# Altium PCB DE-130624.PcbDoc
Units mil, origin at the board's own origin, x right, y up, seen from the top; angles counter-clockwise.
Board outline 1584.68 x 1584.83 mil, 2 copper layers (Top Layer, Bottom Layer); 25 components, 19 nets, 66 pads, 2 vias.
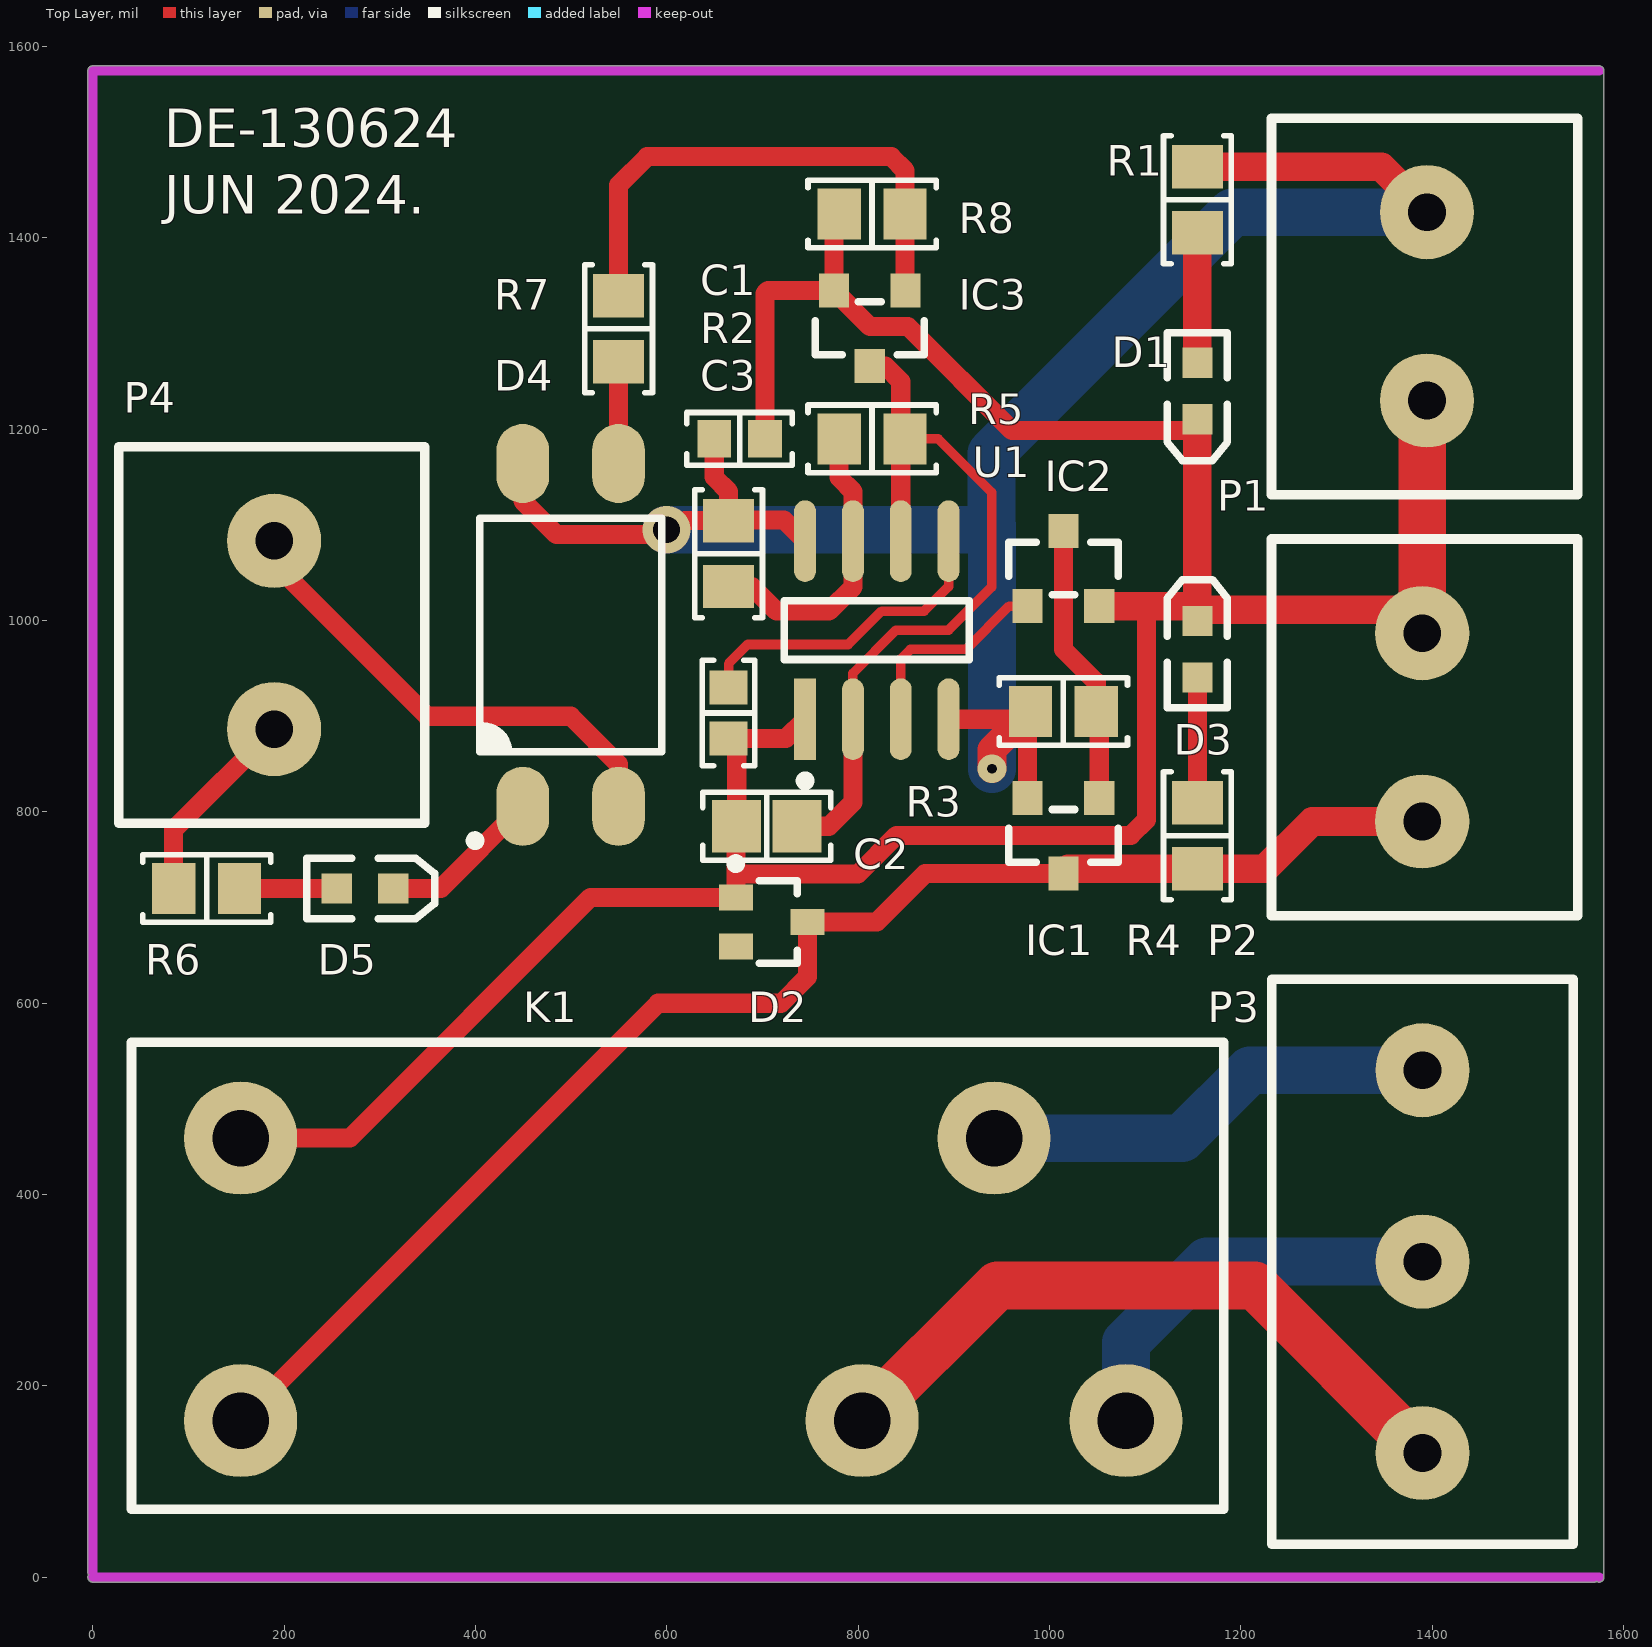
[diagram p0: Top Layer view]
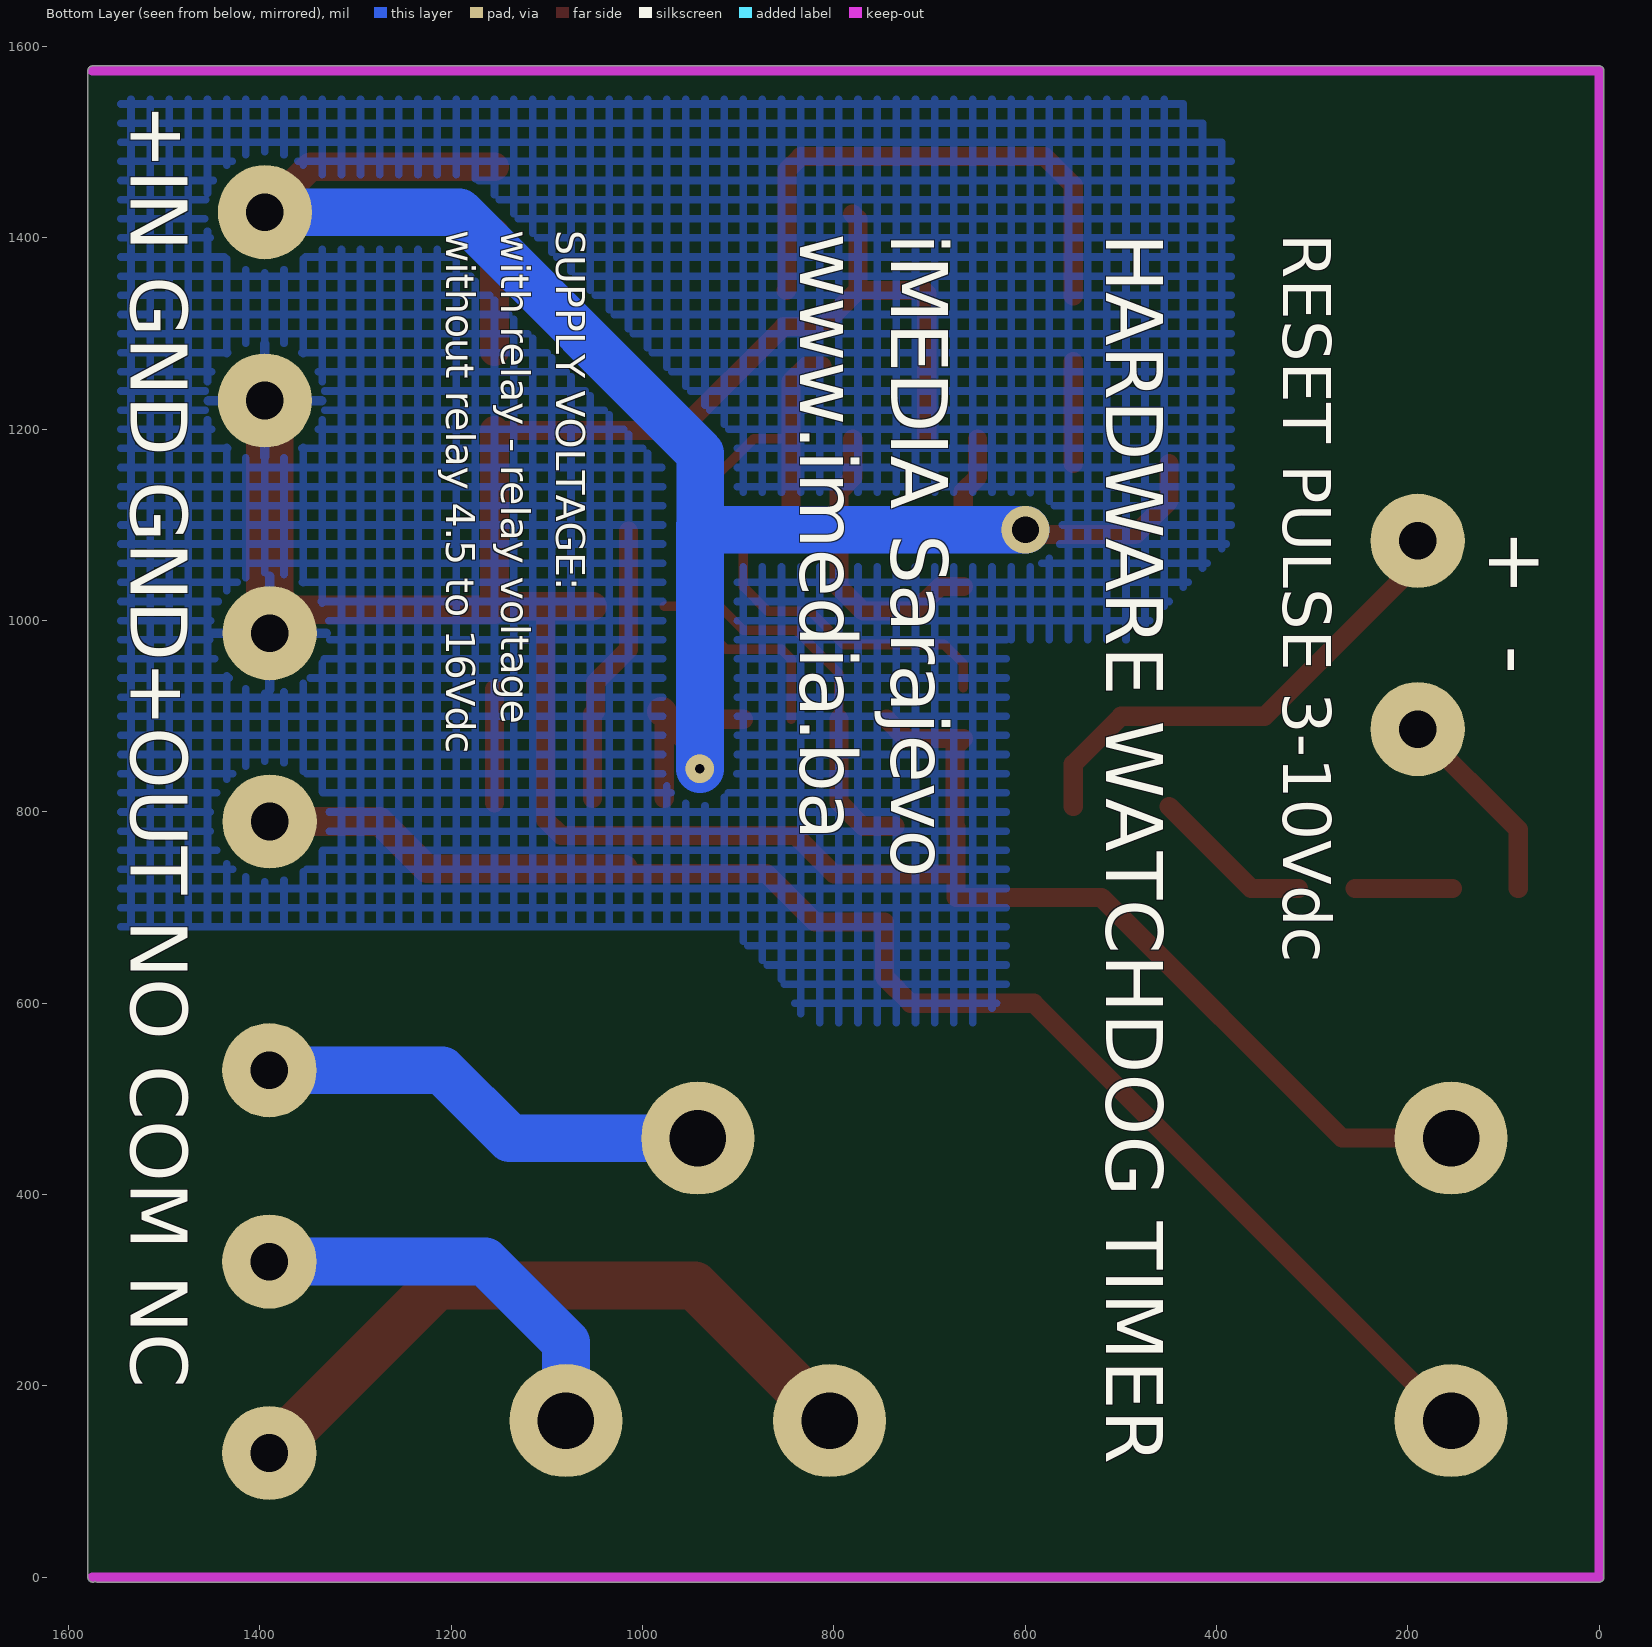
[diagram p1: Bottom Layer view, seen from below]
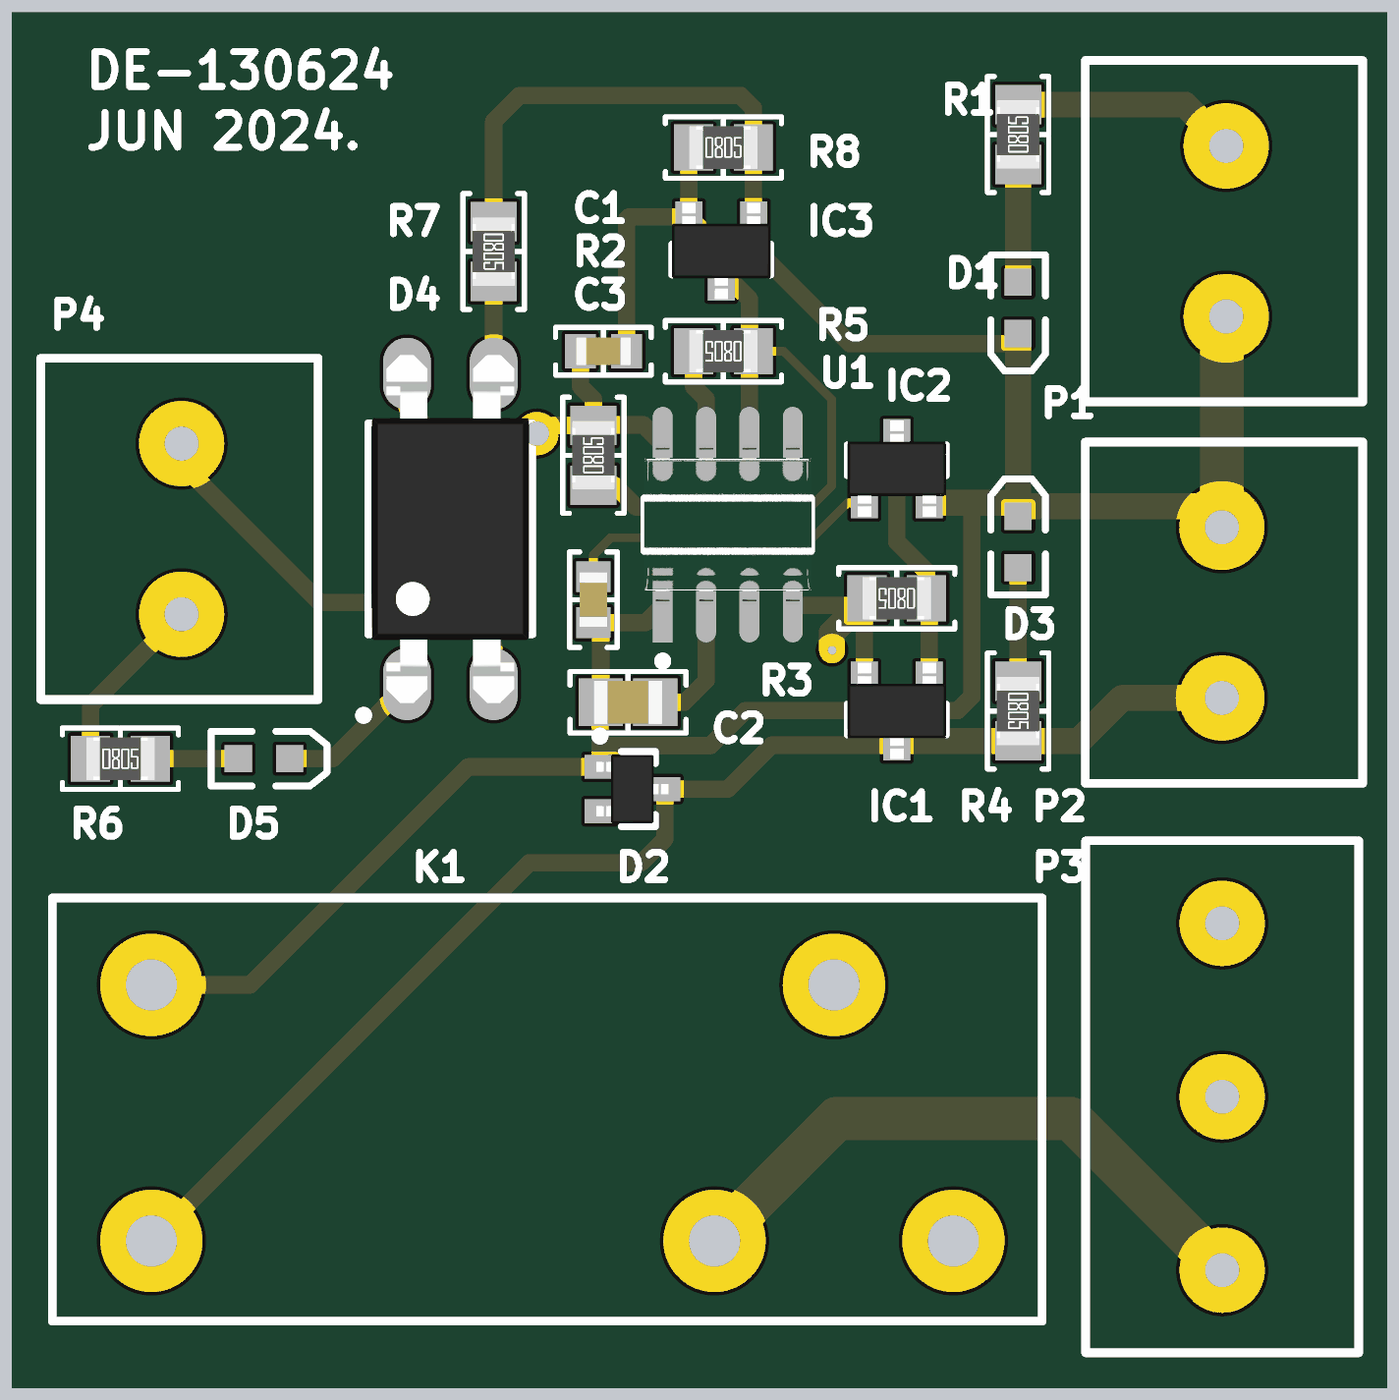
[diagram p2: 3D render of the assembled board from above, using the file's embedded part models]

## Layer stack, top to bottom
Top Solder: solder mask 0.4, Solder Resist, Dk 3.5
Top Layer: signal copper 1.4
Dielectric 1: dielectric 12.6, FR-4, Dk 4.8
Bottom Layer: signal copper 1.4
Bottom Solder: solder mask 0.4, Solder Resist, Dk 3.5

## Board outline
-4.35,2.5 ccw(c0,0) 0,-5.01 1569.65,-5.01 ccw(c1569.65,0) 1572.15,-4.35 ccw(c1574.65,0) 1579.66,0 1579.66,1574.8 ccw(c1574.65,1574.8) 1574.65,1579.82 0,1579.82 ccw(c0,1574.8) -5.02,1574.8 -5.02,5 ccw(c0,5)

## Design rules (kind name [scope] priority, off if disabled: settings)
Clearance [All] p1: gap=10 ignorepadtopadclearanceinfootprint=FALSE except(5: Arc-Text Track-Text SMDPad-Text THPad-Text Via-Text Fill-Text Poly-Text Region-Text Text-Text)
MinimumSolderMaskSliver [All] p1: minsoldermaskwidth=5
PolygonConnect [All] p1: connectstyle=Relief reliefconductorwidth=10 reliefentries=4 polygonreliefangle="90 Angle" airgapwidth=10
RoutingVias [All] p1: holewidth=28 width=50 viastyle="Through Hole" minholewidth=28 minwidth=50 maxholewidth=28 maxwidth=50
SilkToSolderMaskClearance [IsPad] p1: minsilkscreentomaskgap=5 clearancetoexposedcopper=TRUE
SolderMaskExpansion [All] p1: expansion=4
Width [All] p1: maxlimit=100 minlimit=10 preferedwidth=30
28 further rules are at their usual default settings.

## Classes and differential pairs
component class DE-130624: C1 C2 D1 D2 D3 D4 IC1 IC2 IC3 K1 P1 P2 P3 P4 R1 R2 R3 R4 R5 R6 R7 R8 U1

## Components (designator, comment, footprint, x,y, rotation, side; value= is the part's Value field where it differs from the comment)
C1 "0.1 µF" "CAP 0603_1608" 676.22,1190 r180 top
C2 "10 µF" "CAP 0805_2012" 704.65,785 r0 top
C3 "10 nF" "CAP 0603_1608" 664.65,903.43 r90 top
D1 "Green" 1.6X0.8X0.8 1154.65,1240 r270 top
D2 "MMBD4148W-7-F" "DIODES SOT-323-3" 709.65,685 r0 top
D3 "Red" 1.6X0.8X0.8 1154.65,970 r90 top
D4 "LTV-817S-TA" "LITEON LTV-817" 499.65,985 r90 top
D5 "Red" 1.6X0.8X0.8 284.65,720 r0 top
IC1 "DMP3056L-7" "DIODES SOT-23-3" 1014.65,775 r270 top
IC2 "2N7002AQ-7" "DIODES SOT-23-3" 1014.65,1054.45 r90 top
IC3 "2N7002AQ-7" "DIODES SOT-23-3" 812.24,1305.63 r270 top
K1 "FINDER  40.31" "FINDER 40.31" 599.65,335 r0 top
P1 "POWER IN" "TERMINAL BLOK 2" 1394.65,1328.43 r180 top
P2 "POWER OUT" "TERMINAL BLOK 2" 1389.65,888.43 r0 top
P3 "RELAY OUT" "TERMINAL BLOK 3" 1390,330 r180 top
P4 "TRIGGER" "TERMINAL BLOK 2" 189.65,985 r180 top
R1 "4.7 kOhms" "RES 0805_2012" 1154.65,1440 r90 top
R2 "270 kOhms" "RES 0805_2012" 664.65,1070 r90 top
R3 "47 kOhms" "RES 0805_2012" 1014.65,905 r180 top
R4 "4.7 kOhms" "RES 0805_2012" 1154.65,775 r270 top
R5 "820 kOhms" "RES 0805_2012" 814.65,1190 r180 top
R6 "330 Ohms" "RES 0805_2012" 119.09,720 r0 top
R7 "10 kOhms" "RES 0805_2012" 549.65,1305 r270 top
R8 "10 kOhms" "RES 0805_2012" 814.65,1425 r0 top
U1 "NE555DR" FP-D0008A-IPC_B 819.65,990 r90 top

## Footprints (in the part's own frame and the unit in brackets; to place one, negate y for a bottom-side part, rotate by r counter-clockwise, add the part's x,y. Pads: shape width x height; smd on the part's side, far side on the other; paste and mask are expansions set on the pad)
1.6X0.8X0.8 [mm] "SM LED; 2 Flat Leads"
  rect 0.8x0.8 smd: 1(-0.75,0) 2(0.75,0)
  silkscreen extent -1.55,-0.8 1.85,0.8
"CAP 0603_1608" [mm] "Chip Capacitor, 2-Leads, Body 1.60x0.80mm, IPC Medium Density"
  rect 0.9x1 smd: 1(-0.675,0) 2(0.675,0)
  silkscreen extent -1.4,-0.7 1.4,0.7, body extent -0.8,-0.41 0.8,0.41, height 0.82
"CAP 0805_2012" [mm] "Chip Capacitor, 2-Leads, Body 2.00x1.20mm, IPC Medium Density"
  rect 1.3x1.4 smd: 1(-0.8,0) 2(0.8,0)
  silkscreen extent -1.7,-0.9 1.7,0.9, body extent -1,-0.64 1,0.64, height 1.26
"DIODES SOT-23-3" [mm] "SOT23, 3-Leads, Body 2.90x2.40mm, Pitch 0.95mm, IPC Medium Density"
  rect 0.9x0.8 smd: 1(-1,0.95) 2(-1,-0.95) 3(1,0)
  silkscreen extent -0.7,-1.45 0.7,1.45, body extent -1.41,-1.45 1.41,1.45, height 1.5
"DIODES SOT-323-3" [mm] "SOT323, 3-Leads, Body 2.00x2.10mm, Pitch 0.65mm, IPC Medium Density"
  rect 0.9x0.7 smd: 1(-0.95,0.65) 2(0.95,0) 3(-0.95,-0.65)
  silkscreen extent -1.07,-1.1 0.67,1.67, body extent -1.06,-1 1.06,1, height 1
"FINDER 40.31" [mm] "Finder raly tip 40.31"
  round 3 hole 1.5: 1(-11.3,-4.35) 2(-11.3,3.15) 3(5.2,-4.35) 4(8.7,3.15) 5(12.2,-4.35)
  silkscreen extent -14.2,-6.7 14.8,5.7
FP-D0008A-IPC_B [mil]
  rect 85.4x22.92 smd paste+0 mask+0: 1(-93.06,75)
  rrect100% 85.4x22.92 smd paste+0 mask+0: 2(-93.06,25) 3(-93.06,-25) 4(-93.06,-75) 5(93.06,-75) 6(93.06,-25) 7(93.06,25) 8(93.06,75)
  silkscreen extent -162,-97 31,97, body extent -146,-106 146,106, height 10
"LITEON LTV-817" [mm] "SOP, 4-Leads, Body 4.60x6.50mm, Pitch 2.54mm, IPC Medium Density"
  oval 2.1x1.4 smd: 1(-4.55,1.27) 2(-4.55,-1.27) 3(4.55,-1.27) 4(4.55,1.27)
  silkscreen extent -5.59,-2.41 3.1,2.66, body extent -5.1,-2.3 5.1,2.3, height 3.85
"RES 0805_2012" [mm] "Chip Resistor, 2-Leads, Body 2.00x1.25mm, IPC Medium Density"
  rect 1.15x1.35 smd: 1(-0.875,0) 2(0.875,0)
  silkscreen extent -1.7,-0.9 1.7,0.9, body extent -1,-0.62 1,0.63, height 0.6
"TERMINAL BLOK 2" [mm] "Terminal blok 3,5mm"
  round 2.5 hole 1: 1(0,-2.5) 2(0,2.5)
  silkscreen extent -4,-5 4.13,5
"TERMINAL BLOK 3" [mm] "Terminal blok konektor 3 pina"
  round 2.5 hole 1: 1(0,5.08) 2(0,0) 3(0,-5.08)
  silkscreen extent -4,-7.5 4,7.5

## Part data
C1: library part C0603C104K5RAC7411, "CAP CER 0.1UF 50V X7R 0603", Device Package="0603 (1608 Metric)", manufacturer=KEMET, Operating Temperature="-55°C ~ 125°C", Supplier Part Number 1=399-C0603C104K5RAC7411CT-ND, Temperature Coefficient=X7R, Tolerance=±10%, Voltage - Rated=50V, Applications="Bypass, Decoupling", Capacitance="0.1 µF", componentlink1description=Datasheet, componentlink1url=https://api.kemet.com/component-edge/download/datasheet/C0603C104K5RAC7411.pdf, componentlink2description="DigiKey Link", componentlink2url=https://www.digikey.com/en/products/detail/kemet/C0603C104K5RAC7411/3317013, lastupdated="9. 2. 2024. 20:10:30", Lifecycle Status=Active, Minimum Order=1, Mounting Type="Surface Mount, MLCC", Package / Case="0603 (1608 Metric)", packaging=TapeAndReel, Part Number=C0603C104K5RAC7411, Part Status=Active, partid=2233, price=0.01, series="SMD Comm X7R", Size / Dimension="0.063\" L x 0.031\" W (1.60mm x 0.80mm)", Supplier 1=DigiKey, Thickness (Max)="0.035\" (0.90mm)"
C2: library part GMK212BBJ106KG-T, "CAP CER 10UF 35V X5R 0805", Device Package="0805 (2012 Metric)", manufacturer="Taiyo Yuden", Operating Temperature="-55°C ~ 85°C", Supplier Part Number 1=587-4893-1-ND, Temperature Coefficient=X5R, Tolerance=±10%, Voltage - Rated=35V, Applications="SMPS Filtering", Capacitance="10 µF", componentlink1description=Datasheet, componentlink1url=http://www.yuden.co.jp/productdata/catalog/mlcc06_e.pdf, componentlink2description="DigiKey Link", componentlink2url=https://www.digikey.com/en/products/detail/taiyo-yuden/GMK212BBJ106KG-T/6563486, lastupdated="9. 2. 2024. 20:15:45", Lifecycle Status=Active, Minimum Order=1, Mounting Type="Surface Mount, MLCC", Package / Case="0805 (2012 Metric)", packaging=TapeAndReel, Part Number=GMK212BBJ106KG-T, Part Status=Active, partid=11657, price=0.15, series=M, Size / Dimension="0.079\" L x 0.049\" W (2.00mm x 1.25mm)", Supplier 1=DigiKey, Thickness (Max)="0.057\" (1.45mm)"
C3: library part C0603X103K1RAC3316, "CAP CER 0603 10NF 100V X7R", Capacitance="10000 pF", Device Package="0603 (1608 Metric)", manufacturer=KEMET, Operating Temperature="-55°C ~ 125°C", Ratings=AEC-Q200, Supplier Part Number 1=399-C0603X103K1RAC3316CT-ND, Temperature Coefficient=X7R, Tolerance=±10%, Voltage - Rated=100V, Applications="Automotive, Boardflex Sensitive", componentlink1description=Datasheet, componentlink1url=https://api.kemet.com/component-edge/download/datasheet/C0603X103K1RAC3316.pdf, componentlink2description="DigiKey Link", componentlink2url=https://www.digikey.com/en/products/detail/kemet/C0603X103K1RAC3316/10315782, Features="Soft Termination", lastupdated="9. 2. 2024. 20:10:22", Lifecycle Status=Active, Minimum Order=1, Mounting Type="Surface Mount, MLCC", Package / Case="0603 (1608 Metric)", packaging=TapeAndReel, Part Number=C0603X103K1RAC3316, Part Status=Active, partid=8591, price=0.07, series="SMD Auto X7R VW80808", Size / Dimension="0.063\" L x 0.031\" W (1.60mm x 0.80mm)", Supplier 1=DigiKey, Thickness (Max)="0.037\" (0.95mm)"
D1: library part LTST-C170KGKT, "LED GREEN CLEAR SMD", Current - Test=20mA, Device Package="0805 (2012 Metric)", Lens Color=Colorless, manufacturer="Lite-On Inc.", Millicandela Rating=35mcd, Supplier Part Number 1=160-1414-1-ND, Voltage - Forward (Vf) (Typ)=2V, Color=Green, componentlink1description=Datasheet, componentlink1url=http://optoelectronics.liteon.com/upload/download/DS22-2000-073/LTST-C170KGKT.pdf, componentlink2description="DigiKey Link", componentlink2url=http://digikey.com/product-detail/en/lite-on-inc/LTST-C170KGKT/160-1414-1-ND/386776, Configuration=Standard, Height (Max)=1.10mm, lastupdated="3. 6. 2024. 20:00:29", Lens Size="1.40mm x 1.25mm", Lens Style="Rectangle with Flat Top", Lens Transparency=Clear, Lifecycle Status=Active, Minimum Order=1, Mounting Type="Surface Mount", Package / Case="0805 (2012 Metric)", packaging=TapeAndReel, Part Number=LTST-C170KGKT, Part Status=Active, partid=285, price=0.06, series=-, Size / Dimension="2.00mm L x 1.25mm W", Supplier 1=DigiKey, Viewing Angle=130°, Wavelength - Dominant=571nm, Wavelength - Peak=574nm
D2: "DIODE GEN PURP 75V 150MA SOT323", Capacitance @ Vr, F="2pF @ 0V, 1MHz", Current - Average Rectified (Io)=150mA, Current - Reverse Leakage @ Vr="1 µA @ 75 V", manufacturer="Diodes Incorporated", Operating Temperature - Junction="-65°C ~ 150°C", Package / Case="SC-70, SOT-323", Supplier Device Package=SOT-323, Supplier Part Number 1=MMBD4148W-FDICT-ND, Voltage - DC Reverse (Vr) (Max)="75 V", Voltage - Forward (Vf) (Max) @ If="1.25 V @ 150 mA", componentlink1description=Datasheet, componentlink1url=https://www.diodes.com/assets/Datasheets/ds30094.pdf, componentlink2description="DigiKey Link", componentlink2url=https://www.digikey.com/en/products/detail/diodes-incorporated/MMBD4148W-7-F/768787, Diode Type=Standard, lastupdated="3. 6. 2024. 20:01:39", Lifecycle Status=Active, Minimum Order=1, Mounting Type="Surface Mount", packaging=TapeAndReel, Part Number=MMBD4148W-7-F, Part Status=Active, partid=13, price=0.02, Reverse Recovery Time (trr)="4 ns", series=-, Speed="Small Signal =< 200mA (Io), Any Speed", Supplier 1=DigiKey
D3 D5: library part LTST-C170KAKT, "LED RED CLEAR SMD", Current - Test=20mA, Device Package="0805 (2012 Metric)", Lens Color=Colorless, manufacturer="Lite-On Inc.", Millicandela Rating=54mcd, Supplier Part Number 1=160-1412-1-ND, Voltage - Forward (Vf) (Typ)=2V, Color=Red, componentlink1description=Datasheet, componentlink1url=http://optoelectronics.liteon.com/upload/download/DS-22-99-0182/LTST-C170KAKT.pdf, componentlink2description="DigiKey Link", componentlink2url=http://digikey.com/product-detail/en/lite-on-inc/LTST-C170KAKT/160-1412-1-ND/386772, Configuration=Standard, Height (Max)=1.10mm, lastupdated="3. 6. 2024. 20:00:07", Lens Size="1.40mm x 1.25mm", Lens Style="Rectangle with Flat Top", Lens Transparency=Clear, Lifecycle Status=Active, Minimum Order=1, Mounting Type="Surface Mount", Package / Case="0805 (2012 Metric)", packaging=TapeAndReel, Part Number=LTST-C170KAKT, Part Status=Active, partid=305, price=0.07, series=-, Size / Dimension="2.00mm L x 1.25mm W", Supplier 1=DigiKey, Viewing Angle=130°, Wavelength - Dominant=615nm, Wavelength - Peak=621nm
D4: "OPTOISOLATR 5KV TRANSISTOR 4-SMD", Current - DC Forward (If) (Max)=50mA, Current Transfer Ratio (Max)="600% @ 5mA", Current Transfer Ratio (Min)="50% @ 5mA", Device Package="4-SMD, Gull Wing", manufacturer="Lite-On Inc.", Operating Temperature="-30°C ~ 110°C", Supplier Device Package=4-SMD, Supplier Part Number 1=160-2038-1-ND, Voltage - Forward (Vf) (Typ)=1.2V, Voltage - Isolation=5000Vrms, Voltage - Output (Max)=35V, componentlink1description=Datasheet, componentlink1url=http://optoelectronics.liteon.com/upload/download/DS-70-96-0016/LTV-8X7%20series%20201610%20.pdf, componentlink2description="DigiKey Link", componentlink2url=http://digikey.com/product-detail/en/lite-on-inc/LTV-817S-TA/160-2038-1-ND/3711420, Current - Output / Channel=50mA, Input Type=DC, lastupdated="12. 1. 2020. 21:59:02", Lifecycle Status=Active, Minimum Order=1, Mounting Type="Surface Mount", Number of Channels=1, Output Type=Transistor, Package / Case="4-SMD, Gull Wing", packaging=TapeAndReel, Part Number=LTV-817S-TA, Part Status=Active, price=0.12, Rise / Fall Time (Typ)="4µs, 3µs", series=-, Supplier 1=DigiKey, Vce Saturation (Max)=200mV
IC1: "MOSFET P-CH 30V 4.3A SOT23", Current - Continuous Drain (Id) @ 25°C="4.3A (Ta)", Drain to Source Voltage (Vdss)="30 V", Drive Voltage (Max Rds On,  Min Rds On)="4.5V, 10V", Input Capacitance (Ciss) (Max) @ Vds="642 pF @ 25 V", manufacturer="Diodes Incorporated", Operating Temperature="-55°C ~ 150°C (TJ)", Package / Case="TO-236-3, SC-59, SOT-23-3", Power Dissipation (Max)="1.38W (Ta)", Supplier Device Package=SOT-23-3, Supplier Part Number 1=DMP3056L-7DICT-ND, componentlink1description=Datasheet, componentlink1url=https://www.diodes.com/assets/Datasheets/DMP3056L.pdf, componentlink2description="DigiKey Link", componentlink2url=https://www.digikey.com/en/products/detail/diodes-incorporated/DMP3056L-7/5126843, FET Type=P-Channel, Gate Charge (Qg) (Max) @ Vgs="11.8 nC @ 10 V", lastupdated="3. 6. 2024. 20:15:20", Lifecycle Status=Active, Minimum Order=1, Mounting Type="Surface Mount", packaging=TapeAndReel, Part Number=DMP3056L-7, Part Status=Active, price=0.09, Rds On (Max) @ Id, Vgs="50mOhm @ 6A, 10V", series=-, Supplier 1=DigiKey, Technology="MOSFET (Metal Oxide)", Vgs (Max)=±25V, Vgs(th) (Max) @ Id="2.1V @ 250µA"
IC2 IC3: "MOSFET N-CH 60V 180MA SOT23", Current - Continuous Drain (Id) @ 25°C="180mA (Ta)", Drain to Source Voltage (Vdss)="60 V", Drive Voltage (Max Rds On,  Min Rds On)=5V, Input Capacitance (Ciss) (Max) @ Vds="23 pF @ 25 V", manufacturer="Diodes Incorporated", Operating Temperature="-55°C ~ 150°C (TJ)", Package / Case="TO-236-3, SC-59, SOT-23-3", Power Dissipation (Max)="370mW (Ta)", Supplier Device Package=SOT-23-3, Supplier Part Number 1=2N7002AQ-7DICT-ND, componentlink1description=Datasheet, componentlink1url=https://www.diodes.com/assets/Datasheets/2N7002AQ.pdf, componentlink2description="DigiKey Link", componentlink2url=https://www.digikey.com/en/products/detail/diodes-incorporated/2N7002AQ-7/6186937, FET Type=N-Channel, lastupdated="3. 6. 2024. 20:15:18", Lifecycle Status=Active, Minimum Order=1, Mounting Type="Surface Mount", packaging=TapeAndReel, Part Number=2N7002AQ-7, Part Status=Active, price=0.03, Rds On (Max) @ Id, Vgs="5Ohm @ 115mA, 10V", series=-, Supplier 1=DigiKey, Technology="MOSFET (Metal Oxide)", Vgs (Max)=±20V, Vgs(th) (Max) @ Id="2V @ 250µA"
K1: library part "FINDER RELAY 40.31"
P1 P2 P4: library part "TERMINAL BLOK 2", "Terminal blok konektor 3,5 mm"
P3: library part "TERMINAL BLOK 3", "3 pinski terminal blok konektor"
R1 R4: library part AC0805FR-7W4K7L, "RES 4.7K OHM 1% 1/4W 0805", Device Package="0805 (2012 Metric)", manufacturer=Yageo, Operating Temperature="-55°C ~ 155°C", Power (Watts)="0.25W, 1/4W", Ratings=AEC-Q200, Supplier Device Package=0805, Supplier Part Number 1=13-AC0805FR-7W4K7LCT-ND, Temperature Coefficient=±100ppm/°C, Tolerance=±1%, componentlink1description=Datasheet, componentlink1url=https://www.yageo.com/upload/media/product/productsearch/datasheet/rchip/PYu-AC_51_RoHS_L_9.pdf, componentlink2description="DigiKey Link", componentlink2url=https://www.digikey.com/en/products/detail/yageo/AC0805FR-7W4K7L/16989051, Composition="Thick Film", Features="Automotive AEC-Q200, Moisture Resistant", Height - Seated (Max)="0.024\" (0.60mm)", lastupdated="8. 2. 2024. 21:00:02", Lifecycle Status=Active, Minimum Order=1, Number of Terminations=2, Package / Case="0805 (2012 Metric)", packaging=TapeAndReel, Part Number=AC0805FR-7W4K7L, Part Status=Active, partid=77750, price=0.01, Resistance="4.7 kOhms", series=AC, Size / Dimension="0.079\" L x 0.049\" W (2.00mm x 1.25mm)", Supplier 1=DigiKey
R2: library part AC0805FR-07270KL, "RES SMD 270K OHM 1% 1/8W 0805", Device Package="0805 (2012 Metric)", manufacturer=Yageo, Operating Temperature="-55°C ~ 155°C", Power (Watts)="0.125W, 1/8W", Ratings=AEC-Q200, Supplier Device Package=0805, Supplier Part Number 1=13-AC0805FR-07270KLCT-ND, Temperature Coefficient=±100ppm/°C, Tolerance=±1%, componentlink1description=Datasheet, componentlink1url=https://www.yageo.com/upload/media/product/productsearch/datasheet/rchip/PYu-AC_51_RoHS_L_8.pdf, componentlink2description="DigiKey Link", componentlink2url=https://www.digikey.com/en/products/detail/yageo/AC0805FR-07270KL/5896709, Composition="Thick Film", Features="Automotive AEC-Q200, Moisture Resistant", Height - Seated (Max)="0.024\" (0.60mm)", lastupdated="8. 2. 2024. 21:00:40", Lifecycle Status=Active, Minimum Order=1, Number of Terminations=2, Package / Case="0805 (2012 Metric)", packaging=TapeAndReel, Part Number=AC0805FR-07270KL, Part Status=Active, partid=61828, price=0.01, Resistance="270 kOhms", series=AC, Size / Dimension="0.079\" L x 0.049\" W (2.00mm x 1.25mm)", Supplier 1=DigiKey
R3: library part AC0805FR-0747KL, "RES SMD 47K OHM 1% 1/8W 0805", Device Package="0805 (2012 Metric)", manufacturer=Yageo, Operating Temperature="-55°C ~ 155°C", Power (Watts)="0.125W, 1/8W", Ratings=AEC-Q200, Supplier Device Package=0805, Supplier Part Number 1=YAG3735CT-ND, Temperature Coefficient=±100ppm/°C, Tolerance=±1%, componentlink1description=Datasheet, componentlink1url=https://www.yageo.com/upload/media/product/productsearch/datasheet/rchip/PYu-AC_51_RoHS_L_7.pdf, componentlink2description="DigiKey Link", componentlink2url=https://www.digikey.com/en/products/detail/yageo/AC0805FR-0747KL/5896858, Composition="Thick Film", Features="Automotive AEC-Q200, Moisture Resistant", Height - Seated (Max)="0.024\" (0.60mm)", lastupdated="8. 2. 2024. 21:02:08", Lifecycle Status=Active, Minimum Order=1, Number of Terminations=2, Package / Case="0805 (2012 Metric)", packaging=TapeAndReel, Part Number=AC0805FR-0747KL, Part Status=Active, partid=34676, price=0.01, Resistance="47 kOhms", series=AC, Size / Dimension="0.079\" L x 0.049\" W (2.00mm x 1.25mm)", Supplier 1=DigiKey
R5: library part AC0805FR-07820KL, "RES SMD 820K OHM 1% 1/8W 0805", Device Package="0805 (2012 Metric)", manufacturer=Yageo, Operating Temperature="-55°C ~ 155°C", Power (Watts)="0.125W, 1/8W", Ratings=AEC-Q200, Supplier Device Package=0805, Supplier Part Number 1=YAG5381CT-ND, Temperature Coefficient=±100ppm/°C, Tolerance=±1%, componentlink1description=Datasheet, componentlink1url=https://www.yageo.com/upload/media/product/productsearch/datasheet/rchip/PYu-AC_51_RoHS_L_7.pdf, componentlink2description="DigiKey Link", componentlink2url=https://www.digikey.com/en/products/detail/yageo/AC0805FR-07820KL/5896994, Composition="Thick Film", Features="Automotive AEC-Q200, Moisture Resistant", Height - Seated (Max)="0.024\" (0.60mm)", lastupdated="8. 2. 2024. 21:00:48", Lifecycle Status=Active, Minimum Order=1, Number of Terminations=2, Package / Case="0805 (2012 Metric)", packaging=TapeAndReel, Part Number=AC0805FR-07820KL, Part Status=Active, partid=49554, price=0.01, Resistance="820 kOhms", series=AC, Size / Dimension="0.079\" L x 0.049\" W (2.00mm x 1.25mm)", Supplier 1=DigiKey
R6: library part AT0805FRE071KL, "RES 1K OHM 1% 1/8W 0805", Device Package="0805 (2012 Metric)", manufacturer=Yageo, Operating Temperature="-55°C ~ 155°C", Power (Watts)="0.125W, 1/8W", Ratings=AEC-Q200, Resistance="1 kOhms", Supplier Device Package=0805, Supplier Part Number 1=13-AT0805FRE071KLCT-ND, Temperature Coefficient=±50ppm/°C, Tolerance=±1%, componentlink1description=Datasheet, componentlink1url=https://www.yageo.com/upload/media/product/productsearch/datasheet/rchip/PYu-AT_51_RoHS_L_6.pdf, componentlink2description="DigiKey Link", componentlink2url=https://www.digikey.com/en/products/detail/yageo/AT0805FRE071KL/16991952, Composition="Thin Film", Features="Anti-Sulfur, Automotive AEC-Q200, Moisture Resistant", Height - Seated (Max)="0.024\" (0.60mm)", lastupdated="8. 2. 2024. 20:59:53", Lifecycle Status=Active, Minimum Order=1, Number of Terminations=2, Package / Case="0805 (2012 Metric)", packaging=TapeAndReel, partid=81015, Part Number=AT0805FRE071KL, price=0.09, series=AT, Size / Dimension="0.079\" L x 0.049\" W (2.00mm x 1.25mm)", Supplier 1=DigiKey
R7: library part AA0805FR-0710KL, "RES SMD 10K OHM 1% 1/8W 0805", Device Package="0805 (2012 Metric)", manufacturer=Yageo, Operating Temperature="-55°C ~ 155°C", Power (Watts)="0.125W, 1/8W", Ratings=AEC-Q200, Supplier Device Package=0805, Supplier Part Number 1=13-AA0805FR-0710KLCT-ND, Temperature Coefficient=±150ppm/°C, Tolerance=±1%, componentlink1description=Datasheet, componentlink1url=https://www.yageo.com/upload/media/product/productsearch/datasheet/rchip/PYu-AA_51_RoHS_L_3.pdf, componentlink2description="DigiKey Link", componentlink2url=https://www.digikey.com/en/products/detail/yageo/AA0805FR-0710KL/5891935, Composition="Thick Film", Features="Anti-Sulfur, Automotive AEC-Q200, Moisture Resistant", Height - Seated (Max)="0.024\" (0.60mm)", lastupdated="8. 2. 2024. 21:00:40", Lifecycle Status=Active, Minimum Order=1, Number of Terminations=2, Package / Case="0805 (2012 Metric)", packaging=TapeAndReel, Part Number=AA0805FR-0710KL, Part Status=Active, partid=61824, price=0.01, Resistance="10 kOhms", series=AA, Size / Dimension="0.079\" L x 0.049\" W (2.00mm x 1.25mm)", Supplier 1=DigiKey
R8: library part AC0805FR-0727KL, "RES SMD 27K OHM 1% 1/8W 0805", Device Package="0805 (2012 Metric)", manufacturer=Yageo, Operating Temperature="-55°C ~ 155°C", Power (Watts)="0.125W, 1/8W", Ratings=AEC-Q200, Resistance="27 kOhms", Supplier Device Package=0805, Supplier Part Number 1=13-AC0805FR-0727KLCT-ND, Temperature Coefficient=±100ppm/°C, Tolerance=±1%, componentlink1description=Datasheet, componentlink1url=https://www.yageo.com/upload/media/product/productsearch/datasheet/rchip/PYu-AC_51_RoHS_L_8.pdf, componentlink2description="DigiKey Link", componentlink2url=https://www.digikey.com/en/products/detail/yageo/AC0805FR-0727KL/5896714, Composition="Thick Film", Features="Automotive AEC-Q200, Moisture Resistant", Height - Seated (Max)="0.024\" (0.60mm)", lastupdated="8. 2. 2024. 21:00:29", Lifecycle Status=Active, Minimum Order=1, Number of Terminations=2, Package / Case="0805 (2012 Metric)", packaging=TapeAndReel, partid=66664, Part Number=AC0805FR-0727KL, Part Status=Active, price=0.01, series=AC, Size / Dimension="0.079\" L x 0.049\" W (2.00mm x 1.25mm)", Supplier 1=DigiKey
U1: library part CMP-1685-00007-2, "IC OSC SGL TIMER 100KHZ 8-SOIC", Case/Package=SOIC, Frequency=100kHz, High Level Output Current=-200mA, Low Level Output Current=200mA, Max Operating Temperature=70°C, Max Supply Voltage=16V, Min Operating Temperature=0°C, Min Supply Voltage=4.5V, Operating Supply Current=10mA, Package Quantity=2500, Quiescent Current=15mA, Contact Plating=Gold, Height=1.58mm, Lead Free="Lead Free", Length=4.9mm, Mount="Surface Mount", Number of Pins=8, Number of Timers/Counters=1, packaging="Tape and Reel", Radiation Hardening=No, REACH SVHC="No SVHC", Weight=0.002561oz, Width=3.91mm

## Via types
v1: diameter 50, hole 28, Top Layer to Bottom Layer, 1 vias
v2: diameter 30, hole 10, Top Layer to Bottom Layer, 1 vias

## Nets (pads, with @x,y where several pads share a name; then routed paths per layer and width w, separated by ;. In a path a pad name is that pad's centre, name@x,y a point inside that pad or via, vN(x,y) a via of type N, cw(c..) or ccw(c..) an arc to the next point about the centre after c; other vN are vias at no path point)
GND: C1.1 C2.1 C3.1 D1.2 D2.1 D3.2 IC2.2 IC3.2 K1.2 P1.2 P2.2 R8.1 U1.1 | length 3085.9
  Top Layer w20: K1.2 268.66,459.02 520.24,710.59 D2.1 672.24,735 ; C1.1 702.8,1341.85 705.94,1345 IC3.2 ; U1.1 724.55,876.85 C3.1 673.15,868.35 C2.1 672.24,784.09 672.24,735 ; R8.1 774.84,1419.65 IC3.2 ; 1101.48,1015.08 1101.48,791.83 1085.2,775.55 840.2,775.55 799.65,735 672.24,735 ; D1.2@1154.65,1198.66 960.98,1198.66 852.36,1307.28 812.56,1307.28 IC3.2
  Top Layer w30: IC2.2 1101.48,1015.08 1150.91,1015.08 D3.2@1154.65,1011.34 ; D1.2@1154.65,1198.66 D3.2@1154.65,1011.34 ; P2.2 1365.16,1011.34 D3.2@1154.65,1011.34
  Top Layer w50: P2.2 1389.65,1225 P1.2
NetC1_2: C1.2 D4.4 IC1.2 P1.1 R1.2 R2.2 R3.2 U1.4 U1.8 | length 2181.6
  Top Layer w20: D4.4 449.65,1125 484.65,1090 604.65,1090 619.09,1104.45 R2.2 ; C1.2 649.65,1150 664.65,1135 R2.2 ; U1.8 722.7,1105 665.2,1105 R2.2 ; U1.4 R3.2@971.59,896.94 ; IC1.2 977.24,902.05 R3.2
  Top Layer w30: v2(940,845) 940,864.65 939.65,865 R3.2@971.59,896.94 ; R3.2@979.65,905 R3.2 ; R1.2 1347.05,1474.45 P1.1
  Bottom Layer w20: 934.65,1095 939.65,1100
  Bottom Layer w50: v1(599.65,1095) 934.65,1095 ; v2(940,845) 940,1099.65 939.65,1100 939.65,1175 1191.5,1426.85 P1.1
NetC2_2: C2.2 IC3.3 R5.1 U1.2 U1.6 | length 805
  Top Layer w10: U1.2 794.65,945 839.65,990 894.65,990 939.65,1035 939.65,1134.13 883.78,1190 R5.1
  Top Layer w20: C2.2 769.65,785 794.65,810 U1.2 ; IC3.3 828.39,1266.26 844.65,1250 U1.6
NetC3_2: C3.2 U1.5 | length 335.9
  Top Layer w10: C3.2 664.65,955 684.65,975 789.65,975 824.65,1010 869.09,1010 894.65,1035.55 U1.5
NetD1_1: D1.1 R1.1 | length 124.2
  Top Layer w30: D1.1@1154.65,1281.34 R1.1
NetD2_2: D2.2 IC1.3 K1.1 P2.1 R4.2 | length 1528
  Top Layer w20: K1.1 591.02,600 719.65,600 747.05,627.4 D2.2 819.65,685 870.28,735.63 IC1.3 IC1.3@1019.57,740.55
  Top Layer w30: IC1.3@1019.57,740.55 R4.2 1225.2,740.55 1274.65,790 P2.1
NetD3_1: D3.1 R4.1 | length 119.2
  Top Layer w20: R4.1 D3.1@1154.65,928.66
NetD4_1: D4.1 D5.2 | length 171
  Top Layer w20: D5.2 363.78,720 D4.1
NetD4_2: D4.2 P4.1 | length 514.5
  Top Layer w20: P4.1 189.65,1060 349.65,900 499.65,900 549.65,850 D4.2
NetD4_3: D4.3 R7.2 | length 106.4
  Top Layer w20: D4.3 R7.2
NetD5_1: D5.1 R6.2 | length 101.6
  Top Layer w20: R6.2 D5.1
NetIC1_1: IC1.1 IC2.3 R3.1 | length 294.9
  Top Layer w20: IC2.3 1014.65,970 1049.09,935.55 R3.1 1052.05,902.05 IC1.1
NetIC2_1: IC2.1 U1.3 | length 218.5
  Top Layer w10: U1.3 844.65,960 854.65,970 912.8,970 957.87,1015.08 IC2.1
NetIC3_1: IC3.1 R7.1 R8.2 | length 559.2
  Top Layer w20: R7.1 549.65,1455 579.65,1485 834.65,1485 849.09,1470.55 R8.2 849.09,1345.55 IC3.1
NetK1_3: K1.3 P3.1 | length 719.7
  Top Layer w50: K1.3 945.63,305 1214.65,305 P3.1@1389.65,130
  Bottom Layer w50: K1.3@804.37,160.28 K1.3
NetK1_4: K1.4 P3.3 | length 476.9
  Bottom Layer w50: K1.4 1138.66,459.02 1209.65,530 P3.3@1389.65,530
NetK1_5: K1.5 P3.2 | length 426.3
  Bottom Layer w50: K1.5 1079.96,245.32 1164.65,330 P3.2@1389.65,330
NetP4_2: P4.2 R6.1 | length 210.1
  Top Layer w20: R6.1 84.65,781.57 P4.2
NetR2_1: R2.1 R5.2 U1.7 | length 311.9
  Top Layer w20: R2.1 689.09,1035.55 714.65,1010 769.65,1010 794.65,1035 U1.7 794.65,1135 780.2,1149.45 R5.2
pads on no net: D2.3

## Polygon pours and split planes (outlines as drawn)
GND on Bottom Layer "Bottom Layer-No Net" (hatched 90Degree grid 20 track 8, remove dead copper, pour order 0): 1545,1545 439.65,1545 384.65,1490 384.65,1085 489.65,980 619.65,980 619.65,610 649.65,580 829.65,580 854.65,625 909.65,680 1545,680

## Keep-outs
Keep-Out Layer:
  lines w10: 1574.8,0 0,0 0,1574.8 1574.8,1574.8
Mechanical 1:
  lines w10: 1574.8,0 1574.8,1574.8

## Silkscreen, mask and mechanical layers (free items; w line width, h text height)
Top Overlay:
  text "DE-130624" at 75,1495 h40
  text "JUN 2024." at 75,1425 h40
Bottom Overlay:
  text "+IN GND GND+OUT NO COM NC" at 1535,1540 h60 r90
  text "SUPPLY VOLTAGE:" at 1090,1408 h30 r90
  text "with relay - relay voltage" at 1147.5,1408 h30 r90
  text "without relay 4.5 to 16Vdc" at 1205,1408 h30 r90
  text "RESET PULSE 3-10Vdc" at 330,1405 h50 r90
  text "HARDWARE WATCHDOG TIMER" at 515,1405 h60 r90
  text "iMEDIA Sarajevo" at 740,1405 h60 r90
  text "www.imedia.ba" at 835,1405 h60 r90
  text "+  -" at 115,1095 h60 r90
Mechanical 1:
  lines w10: 0,0 1569.65,0 ; 0,5 0,1574.8 1574.65,1574.8 1574.65,0

## Dimensions
1574.65,1574.8 to 1569.65,0 on Mechanical 1
0,1574.8 to 1574.65,1574.8 on Mechanical 1